# Altium PCB Sensor_Box_CAN_SENS.PCBDOC (part 1 of 2)
Units mm, origin at the board's own origin, x right, y up, seen from the top; angles counter-clockwise.
Board outline 78 x 49 mm, 2 copper layers (Top, Bot), stack 1.571 mm thick; 70 components, 54 nets, 293 pads, 158 vias.
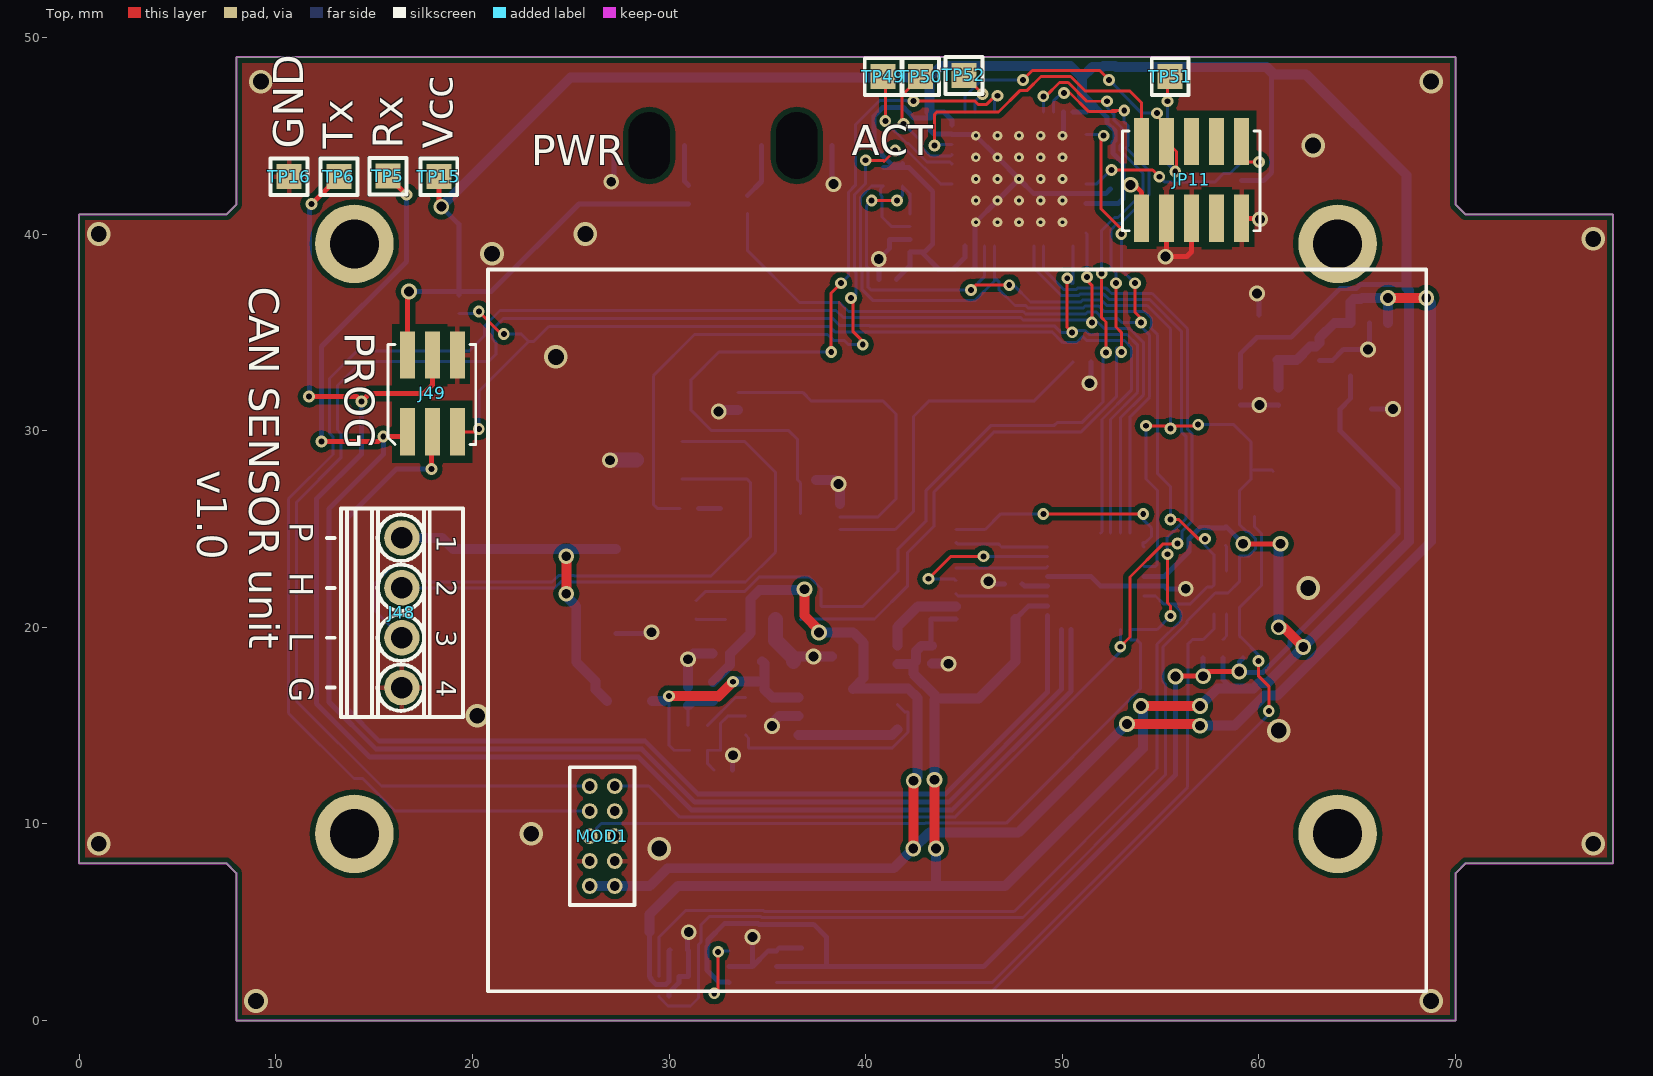
[diagram p0: Top view]
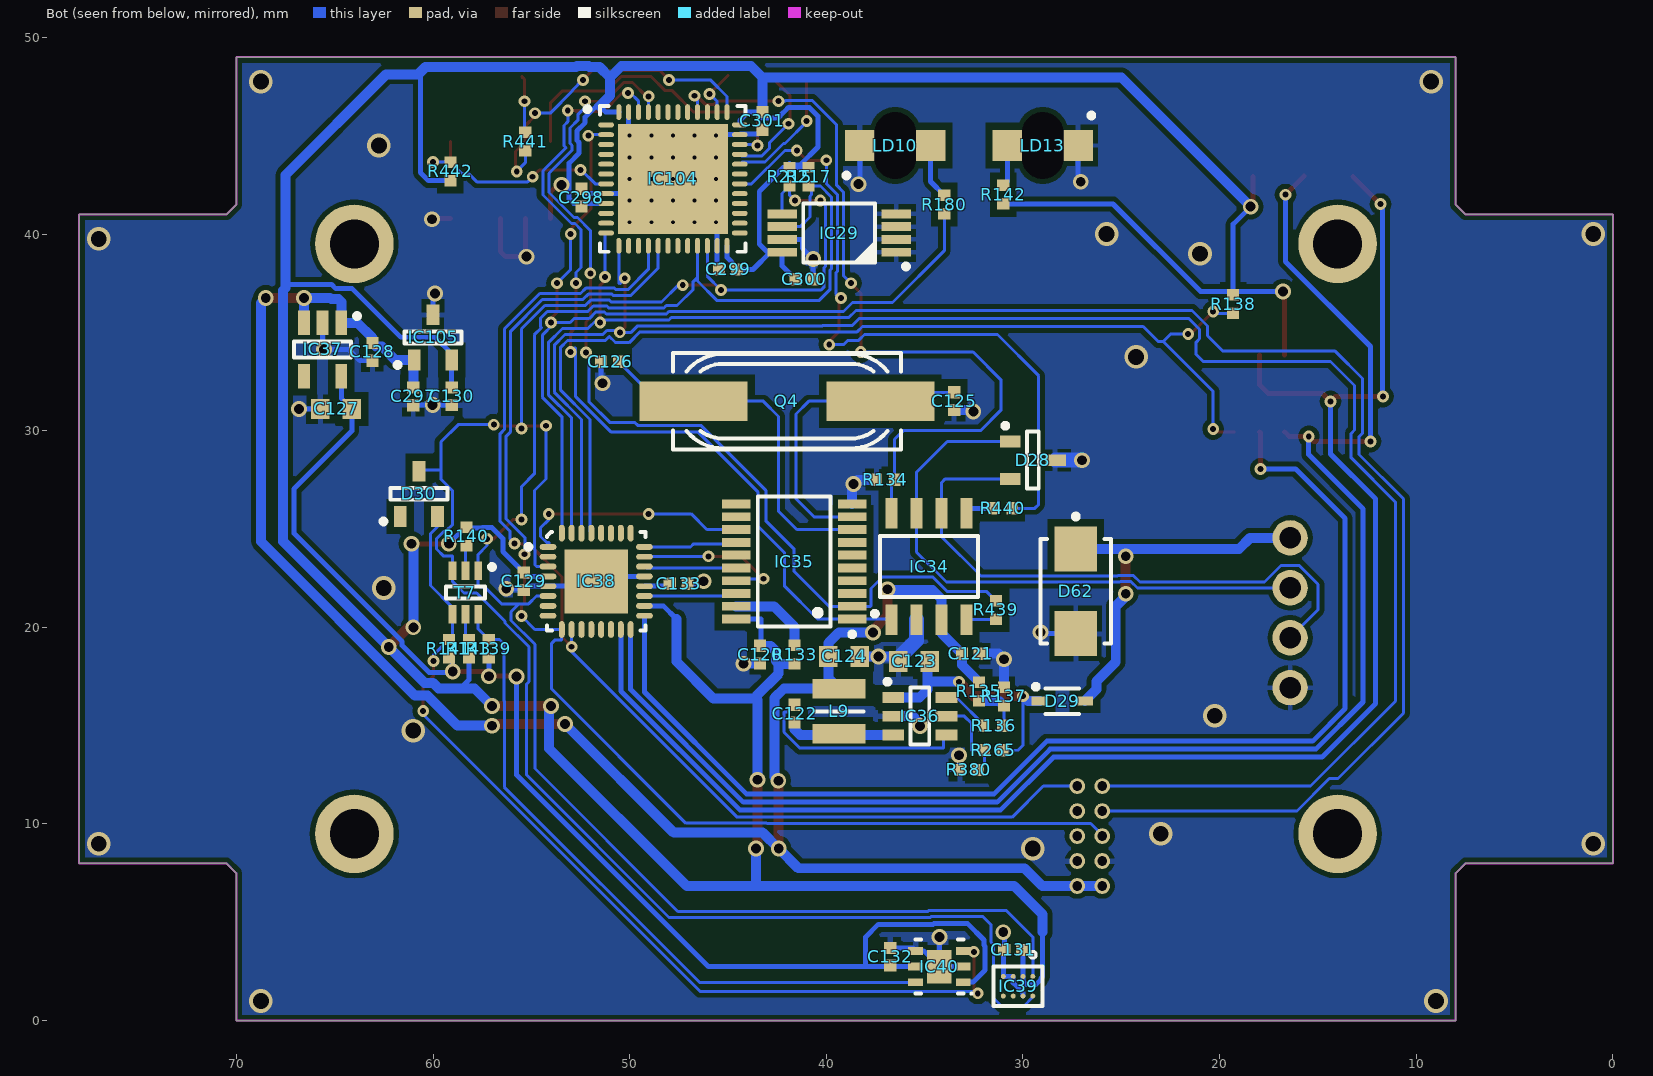
[diagram p1: Bot view, seen from below]
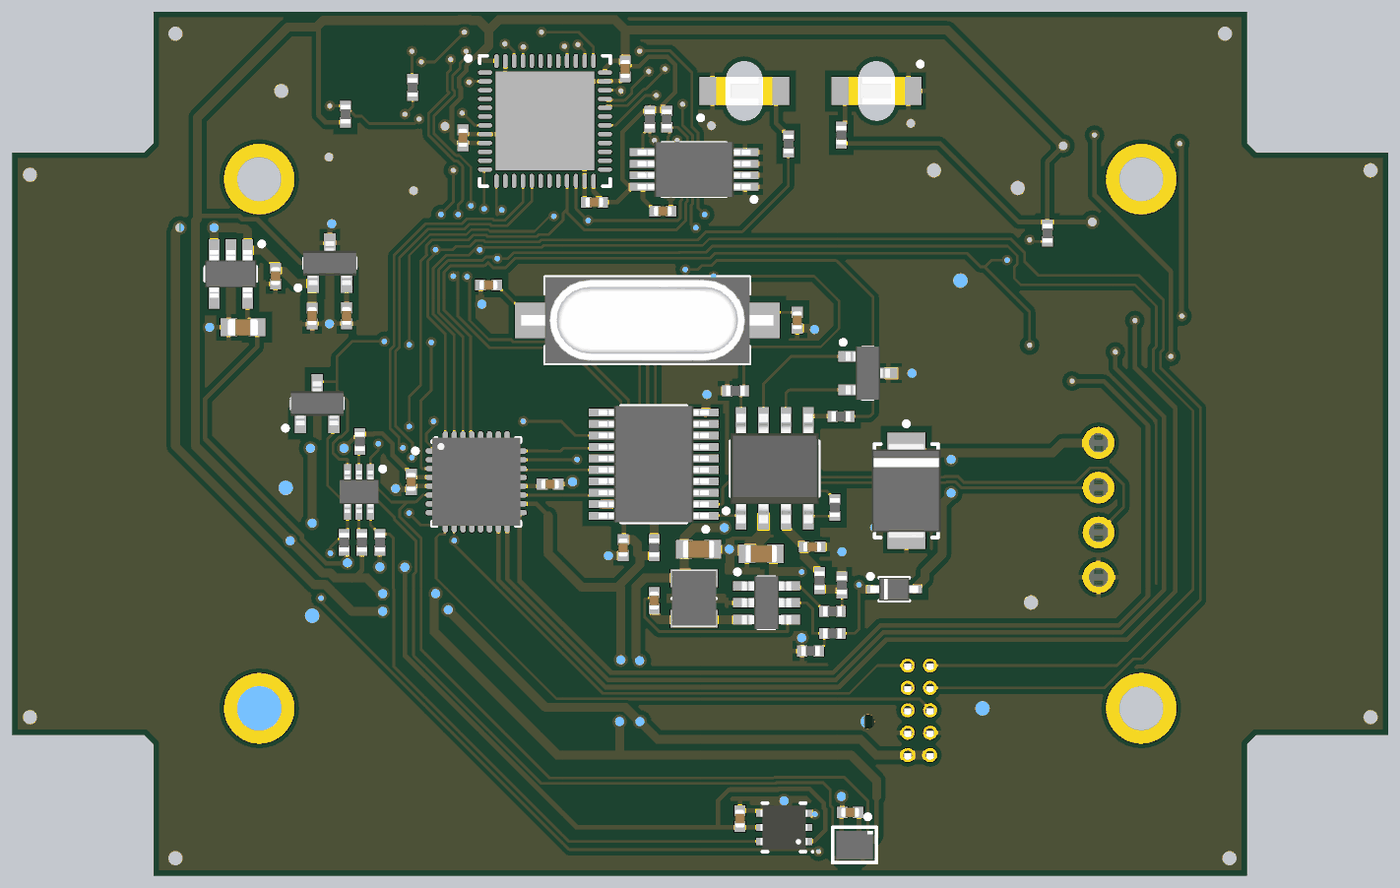
[diagram p2: 3D render of the assembled board from below, using the file's embedded part models]

## Layer stack, top to bottom
TopSolder: solder mask 0.0102, Solder Resist, Dk 3.5
Top: signal copper 0.0356
Dielectric1: core 1.5, FR-4, Dk 4.8
Bot: signal copper 0.0356
BottomSolder: solder mask 0.0102, Solder Resist, Dk 3.5

## Board outline
0,8 7.5,8 8,7.5 8,0 70,0 70,7.5 70.5,8 78,8 78,41 70.5,41 70,41.5 70,49 8,49 8,41.5 7.5,41 0,41

## Design rules (kind name [scope] priority, off if disabled: settings)
Clearance [All] p1: gap=0.152 ignorepadtopadclearanceinfootprint=FALSE except(0.254: Arc-Poly Track-Poly THPad-Poly Via-Poly Fill-Poly Poly-Poly Poly-Region Poly-Text Poly-Hole; 0.381: SMDPad-Poly)
ComponentClearance [All] p1: gap=0.254 collisioncheckmode=3 verticalgap=0 showdistances=FALSE
DiffPairsRouting [All] p1: maxlimit=0.254 minlimit=0.127 mostfreqgap=0.127 toplayer_minwidth=0.127 toplayer_maxwidth=0.381 toplayer_prefwidth=0.254 bottomlayer_minwidth=0.127 bottomlayer_maxwidth=0.381 bottomlayer_prefwidth=0.254 maxuncoupledlength=12.7
FabricationTestPointUsage TestPointUsage [All] p1: valid=0 allowmultiple=FALSE
FabricationTestpoint Testpoint [All] p1: side=3 testpointundercomponent=TRUE minsize=1.016 maxsize=2.54 preferedsize=1.524 minholesize=0.508 maxholesize=1.016 preferedholesize=0.813 testpointgrid=0.025 allowsidetop=TRUE allowsidebottom=TRUE usegrid=TRUE gridtolerance=0
HoleSize [All] p1: absolutevalues=TRUE maxlimit=3.81 minlimit=0.025 maxpercent=80.000 minpercent=20.000
HoleToHoleClearance [All] p1: gap=0.025 allowstackedmicrovias=TRUE
MinimumSolderMaskSliver [All] p1: minsoldermaskwidth=0
PlaneClearance [All] p1: clearance=0.254
PlaneConnect [All] p1: planeconnectstyle=Direct reliefexpansion=0.508 reliefentries=4 reliefconductorwidth=0.254 reliefairgap=0.254
PolygonConnect PolygonConnect_pad [(InPadClass('All Pads'))] p1: connectstyle=Relief reliefconductorwidth=0.254 reliefentries=4 polygonreliefangle="90 Angle" airgapwidth=0.254
PolygonConnect [All] p2: connectstyle=Direct reliefconductorwidth=0.254 reliefentries=4 polygonreliefangle="45 Angle" airgapwidth=0.254
RoomDefinition Sensor_Box_CAN_SENS [InComponentClass('Sensor_Box_CAN_SENS')] p1 off: confinementstyle=ConfineIn formatcopy=TRUE lockcomponents=FALSE outline 12.402,-286.6 195.152,-286.6 195.152,-262.85 12.402,-262.85
RoutingVias RoutingVias_PWR [InNetClass('PWR')] p1: holewidth=0.8 width=1.2 viastyle="Through Hole" minholewidth=0.5 minwidth=0.8 maxholewidth=0.8 maxwidth=1.2
RoutingVias [All] p2: holewidth=0.3 width=0.6 viastyle="Through Hole" minholewidth=0.2 minwidth=0.5 maxholewidth=1 maxwidth=2
SilkToSilkClearance [All] p1: silktosilkclearance=0
SilkToSolderMaskClearance SilkscreenOverComponentPads [IsPad] p1: minsilkscreentomaskgap=0 clearancetoexposedcopper=TRUE
SolderMaskExpansion [All] p1: expansion=0.051
Width Width_PWR [InNetClass('PWR')] p1: maxlimit=1.27 minlimit=0.254 preferedwidth=0.508
Width [InNetClass('All Nets')] p2: maxlimit=1.27 minlimit=0.152 preferedwidth=0.254
19 further rules are at their usual default settings.

## Classes and differential pairs
net class PWR: GND P1V8 P3V3 P5V0 P12V0

## Components (designator, comment, footprint, x,y, rotation, side; value= is the part's Value field where it differs from the comment)
C120 "100nF" CAPC1005X55N 43.366,18.614 r90 bottom
C121 "100nF" CAPC1005X55N 32.65,18.658 r0 bottom
C122 "1uF" CAPC1005X55N 41.616,15.614 r270 bottom
C123 "22uF" CAPC1709X100N 35.54,18.266 r180 bottom
C124 "22uF" CAPC1709X100N 39.096,18.52 r0 bottom
C125 "18pF" CAPC1005X55N 33.5,31.5 r90 bottom
C126 "18pF" CAPC1005X55N 51,33.5 r180 bottom
C127 "1uF" CAPC1608X87N 64.926,31.105 r0 bottom
C128 "100nF" CAPC1005X55N 63.078,34.009 r90 bottom
C129 "100nF" CAPC1005X55N 55.383,22.341 r90 bottom
C130 "100nF" CAPC1005X55N 59.05,31.75 r90 bottom
C131 "100nF" CAPC1005X55N 30.5,3.6 r180 bottom
C132 "100nF" CAPC1005X55N 36.75,3.25 r270 bottom
C133 "1uF" CAPC1005X55N 47.509,22.214 r180 bottom
C297 "1uF" CAPC1005X55N 61,31.739 r90 bottom
C298 "1uF" CAPC1005X55N 52.45,41.849 r270 bottom
C299 "100nF" CAPC1005X55N 45,38.196 r180 bottom
C300 "100nF" CAPC1005X55N 41.116,37.696 r0 bottom
C301 "100nF" CAPC1005X55N 43.25,45.75 r90 bottom
D28 "PESD1CAN-UX" SOT95P237X112-3N 29.5,28.5 r180 bottom
D29 "1N4148WS" SODFL2512X100N 28,16.25 r180 bottom
D30 "BAT54C" SOT95P240X130-3N 60.717,26.786 r90 bottom
D62 "SMBJ15A" DIOM5336X265N 27.316,21.833 r270 bottom
IC29 "M24256-BRDW6" SOP65P640X120-8N 39.35,40.049 r0 bottom
IC34 "MCP2551-I/SN" SOIC127P600X175-8N 34.778,23.092 r90 bottom
IC35 "MCP2515-I/ST" SOP65P640X110-20N 41.636,23.346 r0 bottom
IC36 "AP65111AWU-7" SOT95P280X100-6N 35.241,15.483 r180 bottom
IC37 "MIC5504-1.8YM5" SOT95P270X145-5N 65.612,34.127 r270 bottom
IC38 "ATMEGA328PB-MU" QFN50P500X500X100-33N-S325 51.7,22.341 r180 bottom
IC39 "HDC1000YPA" BGA8C100X50P2X4_159X204X68 30.25,1.75 r270 bottom
IC40 "SGP30" SON80P250X90_HS-7N 34.25,2.75 r0 bottom
IC104 "STM32F042C6U6" STM-UFQFPN48_L 47.8,42.799 r180 bottom
IC105 "AP7313-33SAG-7" SOT95P240X130-3N 60,34.742 r90 bottom
J48 "=Family" PHOENIX_1725672 16.418,20.741 r270 top
J49 "ZL322-2X3P or PLHTD6S-TR-CV" ZL322-2X3P 17.969,31.891 r0 top
JP11 "PLHTD10S-TR-CV" PLHTD10S-TR-CV 59.75,42.75 r0 top
L9 "6.8uH" IND_WALSIN_WLPN3030 39.35,15.726 r90 bottom
LD10 "Green" LED_KINGBRIGHT_KPTR3216 36.5,44.5 r0 bottom
LD13 "Green" LED_KINGBRIGHT_KPTR3216 29,44.5 r180 bottom
MOD1 "PMS7003" PLANTOWER_PMS7003 26.605,9.387 r180 top locked
Q4 "20MHz" XTAL1160X490X430 42,31.5 r0 bottom
R133 "10k" RESC1005X40N 41.616,18.614 r90 bottom
R134 "4k7" RESC1005X40N 37,27.5 r180 bottom
R135 "68k" RESC1005X40N 32.238,16.742 r90 bottom
R136 "68k" RESC1005X40N 31.5,15 r180 bottom
R137 "13k" RESC1005X40N 30.968,16.488 r270 bottom
R138 "10k" RESC1005X40N 19.315,36.438 r270 bottom
R139 "10k" RESC1005X40N 57.161,18.912 r90 bottom
R140 "10k" RESC1005X40N 58.304,24.627 r270 bottom
R141 "10k" RESC1005X40N 59.193,18.912 r90 bottom
R142 "10k" RESC1005X40N 31,42 r90 bottom
R143 "10k" RESC1005X40N 58.177,18.912 r90 bottom
R180 "10k" RESC1005X40N 34,41.5 r90 bottom
R215 "1k" RESC1005X40N 41.866,42.91 r90 bottom
R217 "1k" RESC1005X40N 40.9,42.91 r90 bottom
R265 "13k" RESC1005X40N 31.5,13.75 r180 bottom
R380 "13k" RESC1005X40N 32.75,12.75 r180 bottom
R439 "1k" RESC1005X40N 31.375,20.882 r90 bottom
R440 "1k" RESC1005X40N 31.025,26.051 r180 bottom
R441 "1k" RESC1005X40N 55.305,44.7 r90 bottom
R442 "10k" RESC1005X40N 59.115,43.185 r90 bottom
T7 "BC847BS" SOT65P210X110-6N 58.349,21.771 r270 bottom
TP5 "Test Point" TPS127 15.708,42.94 r90 top
TP6 "Test Point" TPS127 13.219,42.915 r90 top
TP15 "Test Point" TPS127 18.299,42.915 r0 top
TP16 "Test Point" TPS127 10.679,42.915 r0 top
TP49 "Test Point" TPS127 40.89,48 r90 top
TP50 "Test Point" TPS127 42.8,48 r90 top
TP51 "Test Point" TPS127 55.483,48 r90 top
TP52 "Test Point" TPS127 45,48.061 r90 top

## Footprints (in the part's own frame and the unit in brackets; to place one, negate y for a bottom-side part, rotate by r counter-clockwise, add the part's x,y. Pads: shape width x height; smd on the part's side, far side on the other; paste and mask are expansions set on the pad)
BGA8C100X50P2X4_159X204X68 [mm] "BGA, 1.00mm Pitch, Body 1.59x2.04x0.68mm; 8 Pin, 2 Columns X 4 Rows"
  round 0.25 smd: A1(-0.5,0.75) A2(0.5,0.75) B1(-0.5,0.25) B2(0.5,0.25) C1(-0.5,-0.25) C2(0.5,-0.25) D1(-0.5,-0.75) D2(0.5,-0.75)
  silkscreen extent -1.72,-1.25 1,1.25, body extent -0.81,-1.03 0.81,1.04, height 0.68
CAPC1005X55N [mm] "Chip Capacitor, Body 1.0x0.55mm, IPC Medium Density"
  rect 0.62x0.62 smd: 1(-0.45,0) 2(0.45,0)
  body extent -0.52,-0.27 0.53,0.28, height 0.55
CAPC1608X87N [mm] "Chip Capacitor, Body 1.6x0.8mm IPC Medium Density"
  rect 0.95x1 smd: 1(-0.8,0) 2(0.8,0)
  body extent -0.87,-0.47 0.88,0.48, height 0.87
CAPC1709X100N [mm] "Capacitor,non-Polarized, Chip;1.65mm L X 0.85mm W X 1.00mm H, IPC Medium Density"
  rect 0.95x1.05 smd: 1(-0.8,0) 2(0.8,0)
  body extent -0.9,-0.5 0.9,0.5, height 1
DIOM5336X265N [mm] "DO-214-AA/SMB Diode, Molded Body; 5.34mm L X 3.625mm W X 2.65mm H, IPC Medium Density"
  rect 2.3x2.15 smd: 1(-2.15,0) 2(2.15,0)
  silkscreen extent -3.92,-1.8 2.65,1.8, body extent -2.7,-1.95 2.7,1.95, height 2.4
IND_WALSIN_WLPN3030 [mm] "Miniature Surface Mount Power Inductors, 3mm L X 3mm W X 1.5mm H"
  rect 1x2.7 smd: 1(-1.145,0) 2(1.145,0)
  silkscreen extent 0,-1.25 0,1.25, body extent -1.6,-1.25 1.6,1.25, height 2.3
LED_KINGBRIGHT_KPTR3216 [mm] "Reverse Mount LED 3216, Hole 2.1x2.3mm 0.35mm Height"
  rect 1.5x1.6 smd: 1(1.8,0) 2(-1.8,0)
  oval 1.9x3.2 hole 2.1 slot 3.4 at 90 deg unplated mask+0.1: 3(0,0)
  silkscreen extent 2.35,1.4 2.6,1.65, body extent -1.6,-0.8 1.6,0.8, height 0.25
PHOENIX_1725672 [mm] "Micro PCB Terminal Block, Pitch 2.54mm, 4 Positions, Screw Connection"
  round 1.8 hole 1.1: 1(-3.81,0) 2(-1.27,0) 3(1.27,0) 4(3.81,0)
  silkscreen extent -5.31,-3.81 5.31,3.1, body extent -5.31,-3.1 5.31,3.1, height 8.5
PLANTOWER_PMS7003 [mm]
  round 0.8 hole 0.5: 1(0.635,2.54) 2(-0.635,2.54) 3(0.635,1.27) 4(-0.635,1.27) 5(0.635,0) 6(-0.635,0) 7(0.635,-1.27) 8(-0.635,-1.27) 9(0.635,-2.54) 10(-0.635,-2.54)
  silkscreen extent -41.9,-28.81 5.8,7.89, body extent -41.9,-28.81 5.8,7.89, height 12
PLHTD10S-TR-CV [mm] "SMT 1.27 mm dual goldpin"
  rect 0.76x2.4 smd: 1(-5.715,-1.95) 2(-5.715,1.95) 3(-4.445,-1.95) 4(-4.445,1.95) 5(-3.175,-1.95) 6(-3.175,1.95) 7(-1.905,-1.95) 8(-1.905,1.95) 9(-0.635,-1.95) 10(-0.635,1.95)
  silkscreen extent -6.7,-2.58 0.3,2.5, body extent -6.5,-2.15 0.1,2.15, height 4.5
QFN50P500X500X100-33N-S325 [mm] "QFN, (MO-220-VHHD-4) 0.50mm pitch,square; 8 pin X 8 pin, 5mm X 5mm X 1.00mm H body (w/thermal tab 3.25 X 3.25mm),  IPC Medium Density"
  oval 0.85x0.3 smd: 1(-2.45,1.75) 2(-2.45,1.25) 3(-2.45,0.75) 4(-2.45,0.25) 5(-2.45,-0.25) 6(-2.45,-0.75) 7(-2.45,-1.25) 8(-2.45,-1.75) 17(2.45,-1.75) 18(2.45,-1.25) 19(2.45,-0.75) 20(2.45,-0.25) 21(2.45,0.25) 22(2.45,0.75) 23(2.45,1.25) 24(2.45,1.75)
  oval 0.3x0.85 smd: 9(-1.75,-2.45) 10(-1.25,-2.45) 11(-0.75,-2.45) 12(-0.25,-2.45) 13(0.25,-2.45) 14(0.75,-2.45) 15(1.25,-2.45) 16(1.75,-2.45) 25(1.75,2.45) 26(1.25,2.45) 27(0.75,2.45) 28(0.25,2.45) 29(-0.25,2.45) 30(-0.75,2.45) 31(-1.25,2.45) 32(-1.75,2.45)
  rect 3.25x3.25 smd: 33(0,0)
  silkscreen extent -3.58,-2.5 2.5,2.5, body extent -2.5,-2.5 2.5,2.5, height 1
RESC1005X40N [mm] "Chip Resistor, EIA 0402, Metric 1005, Body 1.0x0.5mm, IPC Medium Density"
  rect 0.58x0.62 smd: 1(-0.47,0) 2(0.47,0)
  body extent -0.52,-0.27 0.53,0.28, height 0.4
SODFL2512X100N [mm] "SODFL Diode; 1.70mm W X 1.25mm L X 1.00mm H body, IPC Medium Density"
  rect 0.84x0.46 smd: 1(-1.14,0) 2(1.14,0)
  silkscreen extent -1.48,-0.65 0.85,0.85, body extent -1.35,-0.65 1.35,0.65, height 1
SOIC127P600X175-8N [mm] "SOIC 8, Pitch 1.27mm - Body 4x5mm, IPC Medium Density"
  rect 1.55x0.6 smd: 1(-2.7,1.905) 2(-2.7,0.635) 3(-2.7,-0.635) 4(-2.7,-1.905) 5(2.7,-1.905) 6(2.7,-0.635) 7(2.7,0.635) 8(2.7,1.905)
  silkscreen extent -2.52,-2.5 1.55,2.88, body extent -3.1,-2.5 3.1,2.5, height 1.75
SON80P250X90_HS-7N [mm] "SON, 6-Leads, Body 2.45x2.45mm, Pitch 0.80mm, Thermal Pad 1.70x1.25mm, IPC Medium Density"
  rect 0.75x0.4 smd: 1(-1.21,0.8) 2(-1.21,0) 3(-1.21,-0.8) 4(1.21,-0.8) 5(1.21,0) 6(1.21,0.8)
  rect 1.25x1.7 smd: 7(0,0)
  silkscreen extent -1.67,-1.37 1.22,1.42, body extent -1.33,-1.23 1.32,1.22, height 0.9
SOP65P640X110-20N [mm] "SOP, 20-Leads, Body 6.6x4.5mm (max), Pitch 0.65mm, IPC Medium Density"
  rect 1.45x0.45 smd: 1(-2.95,2.925) 2(-2.95,2.275) 3(-2.95,1.625) 4(-2.95,0.975) 5(-2.95,0.325) 6(-2.95,-0.325) 7(-2.95,-0.975) 8(-2.95,-1.625) 9(-2.95,-2.275) 10(-2.95,-2.925) 11(2.95,-2.925) 12(2.95,-2.275) 13(2.95,-1.625) 14(2.95,-0.975) 15(2.95,-0.325) 16(2.95,0.325) 17(2.95,0.975) 18(2.95,1.625) 19(2.95,2.275) 20(2.95,2.925)
  silkscreen extent -3.07,-3.3 1.85,3.82, body extent -3.12,-3.3 3.12,3.3, height 1.19
SOP65P640X120-8N [mm] "SOP, 0.65mm pitch; 8 pin, 4.40mm W X 3.00mm L X 1.20mm H body, IPC Medium Density"
  rect 1.5x0.45 smd: 1(-2.9,0.975) 2(-2.9,0.325) 3(-2.9,-0.325) 4(-2.9,-0.975) 5(2.9,-0.975) 6(2.9,-0.325) 7(2.9,0.325) 8(2.9,0.975)
  silkscreen extent -3.52,-1.5 1.83,1.82, body extent -3.2,-1.55 3.2,1.55, height 1.2
SOT65P210X110-6N [mm] "SOT363, SC70-6, SOT, 0.65mm Pitch, 6 pin, 1.25mm W X 2.00mm L X 1.10mm H, IPC Medium Density"
  rect 0.95x0.4 smd: 1(-1.1,0.65) 2(-1.1,0) 3(-1.1,-0.65) 4(1.1,-0.65) 5(1.1,0) 6(1.1,0.65)
  silkscreen extent -1.42,-1 0.3,1.47, body extent -1.2,-1.1 1.2,1.1, height 1.1
SOT95P237X112-3N [mm] "SOT, 0.95mm, pitch; 3 pin,1.30mm W X 2.92mm L X 1.12mm H body, IPC Medium Density"
  rect 1.05x0.6 smd: 1(-1.15,0.95) 2(-1.15,-0.95) 3(1.15,0)
  silkscreen extent -1.53,-1.45 0.3,1.87, body extent -1.25,-1.5 1.25,1.5, height 1.1
SOT95P240X130-3N [mm] "SOT23 3-Leads, Pitch 0.95mm - Body 1.3x2.9mm, IPC Medium Density"
  rect 1.05x0.65 smd: 1(-1.15,0.95) 2(-1.15,-0.95) 3(1.15,0)
  silkscreen extent -1.52,-1.45 0.3,1.92, body extent -1.25,-1.5 1.25,1.5, height 1.3
SOT95P270X145-5N [mm] "SOT, 0.95mm Pitch; 5 Pin,1.55mm W X 2.90mm L X 1.45mm H body, IPC Medium Density"
  rect 1.25x0.6 smd: 1(-1.35,0.95) 2(-1.35,0) 3(-1.35,-0.95) 4(1.35,-0.95) 5(1.35,0.95)
  silkscreen extent -1.82,-1.45 0.4,1.87, body extent -1.35,-1.45 1.35,1.45, height 1.45
SOT95P280X100-6N [mm] "SOT23, 0.95mm pitch; 6 pin, 1.625mm W X 2.90mm L X 1.00mm H body, IPC Medium Density"
  rect 1.1x0.55 smd: 1(-1.35,0.95) 2(-1.35,0) 3(-1.35,-0.95) 4(1.35,-0.95) 5(1.35,0) 6(1.35,0.95)
  silkscreen extent -1.78,-1.45 0.48,1.87, body extent -1.4,-1.5 1.4,1.5, height 1
STM-UFQFPN48_L [mm] "QFN, 48-Leads, Body 7.1x7.1mm, Pitch 0.5mm, Thermal Pad 5.6x5.6mm, IPC High Density"
  oval 0.8x0.25 smd: 1(-3.4,2.75) 2(-3.4,2.25) 3(-3.4,1.75) 4(-3.4,1.25) 5(-3.4,0.75) 6(-3.4,0.25) 7(-3.4,-0.25) 8(-3.4,-0.75) 9(-3.4,-1.25) 10(-3.4,-1.75) 11(-3.4,-2.25) 12(-3.4,-2.75) 25(3.4,-2.75) 26(3.4,-2.25) 27(3.4,-1.75) 28(3.4,-1.25) 29(3.4,-0.75) 30(3.4,-0.25) 31(3.4,0.25) 32(3.4,0.75) 33(3.4,1.25) 34(3.4,1.75) 35(3.4,2.25) 36(3.4,2.75)
  oval 0.25x0.8 smd: 13(-2.75,-3.4) 14(-2.25,-3.4) 15(-1.75,-3.4) 16(-1.25,-3.4) 17(-0.75,-3.4) 18(-0.25,-3.4) 19(0.25,-3.4) 20(0.75,-3.4) 21(1.25,-3.4) 22(1.75,-3.4) 23(2.25,-3.4) 24(2.75,-3.4) 37(2.75,3.4) 38(2.25,3.4) 39(1.75,3.4) 40(1.25,3.4) 41(0.75,3.4) 42(0.25,3.4) 43(-0.25,3.4) 44(-0.75,3.4) 45(-1.25,3.4) 46(-1.75,3.4) 47(-2.25,3.4) 48(-2.75,3.4)
  rect 5.6x5.6 smd: 49(0,0)
  silkscreen extent -4.48,-3.7 3.7,3.7, body extent -3.55,-3.55 3.55,3.55, height 0.6
TPS127 [mm] "1.27 x  1.27mm SMD Test Point Area"
  rect 1.27x1.27 smd paste-1.27: 1(0,0)
  silkscreen extent -0.94,-0.94 0.94,0.94
XTAL1160X490X430 [mm] "HC49/4H SMX Case, SMD Cristal, Body 11.6x4.9mm"
  rect 5.5x2 smd: 1(-4.75,0) 2(4.75,0)
  silkscreen extent -5.8,-2.45 5.8,2.45, body extent -7.15,-2.45 7.15,2.45, height 4.3
ZL322-2X3P [mm] "SMT 1.27 mm dual goldpin"
  rect 0.76x2.4 smd: 1(-1.27,-1.95) 2(-1.27,1.95) 3(0,-1.95) 4(0,1.95) 5(1.27,-1.95) 6(1.27,1.95)
  silkscreen extent -2.25,-2.59 2.21,2.49, body extent -2.05,-2.15 2.03,2.15, height 4.5

## Part data
C120 C121 C128 C129 C130 C131 C132 C299 C300 C301: library part CC0402_100NF_16V_10%_X5R, "Non-polarised capacitor", Case=0402, Manufacturer=GENERIC, Manufacturer1 ComponentHeight=0.55mm, Manufacturer1 Example=MURATA, Manufacturer1 Part Number=GRM155R61C104KA88D, Tolerance=±10%, Voltage=16V, Author="CERN DEM JLC", Component Type=Standard, CreateDate=10.12.2013, HelpURL=\\cern.ch\dfs\Applications\Altium\Datasheets\CC0402_X5R_MURATA_GRM.pdf, LatestRevisionDate=10.12.2013, Manufacturer Part Number=CC0402_100NF_16V_10%_X5R, Mounted=Yes, Part Description="SMD Multilayer Chip Ceramic Capacitor", Part Number=CC0402_100NF_16V_10%_X5R, Pin Count=2, Sense=No, SMD=Yes, Socket=No, Status=None, TC=X5R
C122 C133 C297 C298: library part CC0402_1UF_16V_10%_X5R, "Non-polarised capacitor", Case=0402, Manufacturer=GENERIC, Manufacturer1 ComponentHeight=0.55mm, Manufacturer1 Example=TDK, Manufacturer1 Part Number=C1005X5R1C105KT, Tolerance=±10%, Voltage=16V, Author="CERN DEM JLC", Component Type=Standard, CreateDate=25.10.2012, HelpURL=\\cern.ch\dfs\Applications\Altium\Datasheets\CC0402_X5R_TDK_C.pdf, LatestRevisionDate=25.10.2012, Manufacturer Part Number=CC0402_1UF_16V_10%_X5R, Mounted=Yes, Part Description="SMD Multilayer Chip Ceramic Capacitor", Part Number=CC0402_1UF_16V_10%_X5R, Pin Count=2, Sense=No, SMD=Yes, Socket=No, Status=Preferred, TC=X5R
C123 C124: library part CC0603_22UF_6.3V_20%_X5R, "Non-polarised capacitor", Case=0603, Manufacturer=GENERIC, Manufacturer1 ComponentHeight=1mm, Manufacturer1 Example=TDK, Manufacturer1 Part Number=C1608X5R0J226M080AC, Tolerance=±20%, Voltage=6.3V, Author="CERN DEM JLC", Component Type=Standard, CreateDate=16.12.2013, HelpURL=\\cern.ch\dfs\Applications\Altium\Datasheets\CC0603_X5R_TDK_C.pdf, LatestRevisionDate=13.09.2016, Manufacturer Part Number=CC0603_22UF_6.3V_20%_X5R, Mounted=Yes, Part Description="SMD Multilayer Chip Ceramic Capacitor", Part Number=CC0603_22UF_6.3V_20%_X5R, Pin Count=2, Sense=No, SMD=Yes, Socket=No, Status=None, TC=X5R
C125 C126: library part CC0402_18PF_50V_5%_C0G, "Non-polarised capacitor", Case=0402, Manufacturer=GENERIC, Manufacturer1 ComponentHeight=0.55mm, Manufacturer1 Example=KEMET, Manufacturer1 Part Number=C0402C180J5GACTU, Tolerance=±5%, Voltage=50V, Author="CERN DEM JLC", Component Type=Standard, CreateDate=04.10.2016, HelpURL="\\cern.ch\dfs\Applications\Altium\Datasheets\CC0805_C0G_KEMET_(Commercial Grade).pdf", LatestRevisionDate=04.10.2016, Manufacturer Part Number=CC0402_18PF_50V_5%_C0G, Mounted=Yes, Part Description="SMD Multilayer Chip Ceramic Capacitor", Part Number=CC0402_18PF_50V_5%_C0G, Pin Count=2, Sense=No, SMD=Yes, Socket=No, Status=Preferred, TC=C0G/NP0
C127: library part CC0603_1UF_25V_10%_X7R, "Non-polarised capacitor", Case=0603, Manufacturer=GENERIC, Manufacturer1 ComponentHeight=0.9mm, Manufacturer1 Example=MURATA, Manufacturer1 Part Number=GRM188R71E105KA12D, Tolerance=±10%, Voltage=25V, Author="CERN DEM JLC", Component Type=Standard, CreateDate=2011-01-18, HelpURL=\\cern.ch\dfs\Applications\Altium\Datasheets\CC0603_X7R_MURATA.pdf, LatestRevisionDate=2011-01-18, Manufacturer Part Number=CC0603_1UF_25V_10%_X7R, Mounted=Yes, Part Description="SMD Multilayer Chip Ceramic Capacitor", Part Number=CC0603_1UF_25V_10%_X7R, Pin Count=2, SMD=Yes, Socket=No, Status=None, Table="Capacitors SMD", TC=X7R
D28: "TVS Diode for CAN", Case=SOT-23, Manufacturer=Nexperia, Power=400W, Voltage=24V, Author="CERN DEM JLC", Bonding=No, ComponentHeight=1.12mm, Component Type=Standard, CreateDate=03.09.2014, Device=PESD1CAN-UX, HelpURL=\\cern.ch\dfs\Applications\Altium\Datasheets\SM712.TCT.pdf, LatestRevisionDate=13.01.2015, Manufacturer Part Number=PESD1CAN-UX, Mounted=Yes, PackageDescription="SOT, 0.95mm, pitch; 3 pin,1.30mm W X 2.92mm L X 1.12mm H body, IPC Medium Density", Part Description="TVS Diode for CAN", Part Number=PESD1CAN-UX, Pin Count=3, PressFit=No, Sense=No, SMD=Yes, Socket=No
D29: "Diode", Case=SOD-323F, Manufacturer="FAIRCHILD SEMICONDUCTOR", Power=150mA, Voltage=75V, Author="CERN DEM JLC", Bonding=No, ComponentHeight=1mm, Component Type=Standard, CreateDate=12.05.2011, Device=1N4148WS, HelpURL=\\cern.ch\dfs\Applications\Altium\Datasheets\1N4148WS.pdf, LatestRevisionDate=12.05.2011, Manufacturer Part Number=1N4148WS, Mounted=Yes, PackageDescription="SODFL Diode; 1.70mm W X 1.25mm L X 1.00mm H body, IPC Medium Density", Part Description="Small Signal Diodes", Part Number=1N4148WS, Pin Count=2, PressFit=No, Sense=No, SMD=Yes, Socket=No
D30: "Dual Common Cathode Schottky Diodes", Case=SOT23-3, Manufacturer="FAIRCHILD SEMICONDUCTOR", Power=200mA, Voltage=30V, Author="CERN DEM JLC", Bonding=No, ComponentHeight=1.30mm, Component Type=Standard, CreateDate=17.09.2009, Device=BAT54C, HelpURL=\\cern.ch\dfs\Applications\Altium\Datasheets\BAT54C.pdf, LatestRevisionDate=27.05.2010, Manufacturer Part Number=BAT54C, Mounted=Yes, PackageDescription="SOT23 3-Leads, Pitch 0.95mm - Body 1.3x2.9mm, IPC Medium Density", Part Description="Dual Common Cathode Small Signal Schottky Diode", Part Number=BAT54C, Pin Count=3, PressFit=No, Sense=No, SMD=Yes, Socket=No
D62: "Zener Diode", Case=DO-214AA, Manufacturer="FAIRCHILD SEMICONDUCTOR", Power=600W, Voltage=15V, Author="CERN DEM JLC", Bonding=No, ComponentHeight=2.65mm, Component Type=Standard, CreateDate=08.12.2008, Device=SMBJ15A, HelpURL=\\cern.ch\dfs\Applications\Altium\Datasheets\SMBJ.pdf, LatestRevisionDate=19.12.2011, Manufacturer Part Number=SMBJ15A, Mounted=Yes, PackageDescription="DO-214-AA/SMB Diode, Molded Body; 5.34mm L X 3.625mm W X 2.65mm H, IPC Medium Density", Part Description="Uni-Directional Transient Voltage Suppressor Diode", Part Number=SMBJ15A, Pin Count=2, PressFit=No, Sense=No, SMD=Yes, Socket=No
IC29: "256-Kbit Serial I²C Bus EEPROM", Case=TSSOP8, Manufacturer="ST MICROELECTRONICS", Part Number=M24256-BRDW6P, Author="CERN DEM MR", Bonding=No, ComponentHeight=1.2mm, Component Type=Standard, CreateDate=17.03.2016, Device=M24256-BRDW6, HelpURL=\\cern.ch\dfs\Applications\Altium\Datasheets\M24256-BRDW6P.pdf, LatestRevisionDate=17.03.2016, Manufacturer Part Number=M24256-BRDW6, Mounted=Yes, PackageDescription="SOP, 0.65mm pitch; 8 pin, 4.40mm W X 3.00mm L X 1.20mm H body, IPC Medium Density", Part Description="256-Kbit Serial I²C Bus EEPROM", Pin Count=8, PressFit=No, Sense=No, SMD=Yes, Socket=No
IC34: "High-Speed CAN Transceiver, 8-Pin SOIC, Industrial Temperature", Case=SOIC8, Manufacturer="MICROCHIP TECHNOLOGY", Author=GK, Bonding=No, ComponentHeight=1.75mm, Component Type=Standard, CreateDate=07.09.2016, Device=MCP2551-I/SN, LatestRevisionDate=07.09.2016, Manufacturer Part Number=MCP2551-I/SN, Mounted=Yes, PackageDescription="SOIC 8, Pitch 1.27mm - Body 4x5mm, IPC Medium Density", Part Description="High-Speed CAN Transceiver", Part Number=MCP2551-I/SN, Pin Count=8, PressFit=No, Sense=No, SMD=Yes, Socket=No
IC35: library part IFC_MCP2515_TSSOP, "CAN Controller With SPI nterface", Case=TSSOP20, Manufacturer=Microchip, Manufacturer Part Number=MCP2515T-I/ST, Component Type=Standard, Device=MCP2515, Mounted=Yes, PackageDescription="TSSOP 20, Pitch 0.65mm - Body 4.5x6.5mm, IPC Medium Density", Part Description="Stand-Alone CAN Controller with SPI Interface", Part Number=MCP2515T-I/ST, Pin Count=20, SMD=Yes
IC36: "Light Load Improved 1.5A Synch DC/DC Buck Converter", Case=SOT23-6, Manufacturer="DIODES INCORPORATED", Author="CERN DEM JLC", Bonding=No, ComponentHeight=1.1mm, Component Type=Standard, CreateDate=20.03.2018, Device=AP65111AWU-7, HelpURL=\\cern.ch\dfs\Applications\Altium\Datasheets\AP65111AWU-7.pdf, LatestRevisionDate=20.03.2018, Manufacturer Part Number=AP65111AWU-7, Mounted=Yes, PackageDescription="SOT23, 0.95mm pitch; 6 pin, 1.625mm W X 2.90mm L X 1.00mm H body, IPC Medium Density", Part Description="Light Load Improved 1.5A Synch DC/DC Buck Converter", Part Number=AP65111AWU-7, Pin Count=6, PressFit=No, Sense=No, SMD=Yes, Socket=No
IC37: "300mA, High PSRR, Low Quiescent Current LDO", Case=SOT23-5, Manufacturer="MICROCHIP TECHNOLOGY", Author=GK, Bonding=No, ComponentHeight=1.45mm, Component Type=Standard, CreateDate=03.05.2012, Device=MIC5504-1.8YM5, HelpURL=\\cern.ch\dfs\Applications\Altium\Datasheets\MCP1802T-3002I-OT.pdf, LatestRevisionDate=17.09.2014, Manufacturer Part Number=MIC5504-1.8YM5, Mounted=Yes, PackageDescription="SOT, 0.95mm Pitch; 5 Pin,1.55mm W X 2.90mm L X 1.45mm H body, IPC Medium Density", Part Description="1.8V, 300mA, High PSRR, Low Quiescent Current LDO", Part Number=MIC5504-1.8YM5, Pin Count=3, PressFit=No, Sense=No, SMD=Yes, Socket=No
IC38: "8-bit AVR 20MHz Microcontroller With 32K Bytes In-System  Programmable  Flash", Case=QFN32, Manufacturer=ATMEL, Author=GK, Bonding=No, ComponentHeight=1mm, Component Type=Standard, CreateDate=2011-02-08, Device=ATMEGA328PB-MU, HelpURL=\\cern.ch\dfs\Applications\Altium\Datasheets\ATMEGA328P-MU.pdf, LatestRevisionDate=2014-07-02, Manufacturer Part Number=ATMEGA328PB-MU, Mounted=Yes, PackageDescription="QFN, (MO-220-VHHD-2) 0.50mm pitch,square; 8 pin X 8 pin, 5mm X 5mm X 1.00mm H body (w/thermal tab 3.25 X 3.25mm),  IPC Medium Density", Part Description="8-bit AVR Microcontroller, 32KB Flash, 1KB EEPROM, 2KB SRAM, 32-pin MLF, Industrial Grade (-40°C to 85°C)", Part Number=ATMEGA328PB-MU, Pin Count=33, PressFit=No, Sense=No, SMD=Yes, Socket=No
IC39: "Low Power, High Accuracy Digital Humidity Sensor With Temperature Sensor", Case=DSBGA8, Manufacturer="TEXAS INSTRUMENTS", Author="CERN DEM MR", Bonding=No, ComponentHeight=0.68mm, Component Type=Standard, CreateDate=08.02.2016, Device=HDC1000YPA, HelpURL=\\cern.ch\dfs\Applications\Altium\Datasheets\HDC1000YPA.pdf, LatestRevisionDate=08.02.2016, Manufacturer Part Number=HDC1000YPA, Mounted=Yes, PackageDescription="BGA, 1.00mm pitch, Body 1.59x2.04x0.68mm; 8 pin, 2 columns X 4 rows", Part Description="Low Power, High Accuracy Digital Humidity Sensor With Temperature Sensor", Part Number=HDC1000YPA, Pin Count=8, PressFit=No, Sense=No, SMD=Yes, Socket=No
IC40: "MEMS metal  -  oxide gas sensor for measuring  volatile organic compounds (VOCs)", Case=DFN6, Manufacturer=SENSIRION, Author="CERN DEM JLC", Bonding=No, ComponentHeight=0.9, Component Type=Standard, CreateDate=27.02.2013, Device=SGP30, HelpURL=\\cern.ch\dfs\Applications\Altium\Datasheets\SHT21S.pdf, LatestRevisionDate=09.11.2017, Manufacturer Part Number=SGP30, Mounted=Yes, PackageDescription="DFN 2.45 x 2.45 x 0.9 mm", Part Description="MEMS metal - oxide gas sensor for measuring  volatile organic compounds (VOCs)", Part Number=SGP30, Pin Count=6, PressFit=No, Sense=Yes, Sense Comment=Non-washable, SMD=Yes, Socket=No
IC104: library part CMP-0304-00104-1, "ARM Cortex-M0 32-bit MCU, 32 KB Flash, 6 KB Internal RAM, 38 I/Os, 48-Pin UFQFPN, -40 to 85 degC, Tray", I/Os (High Current)=38, Operating Frequency(F) (Processor speed) (MHz)=48, Package Description="48-Pin Ultra Thin Fine Pitch Quad Flat No-Lead, 7 x 7 x 0.6 mm Body, 0.5 mm Pitch, Exposed Pad", Package Reference=UFQFPN48, Supply Voltage(Vcc) min (V)=2, ComponentLink1Description="Manufacturer URL", ComponentLink1URL=http://www.st.com/, ComponentLink2Description=Datasheet, ComponentLink2URL=http://www.st.com/st-web-ui/static/active/en/resource/technical/document/datasheet/DM00105814.pdf, Core="ARM Cortex-M0", DatasheetVersion="Rev. 5", FLASH Size (Prog) (kB)=32, Internal RAM Size (kB)=6, Mounting Technology="Surface Mount", Packing=Tray
IC105: "3-Terminal Regulator 1=IN 2=OUT 3=GND", Case=SOT23, Manufacturer="DIODES INCORPORATED", Author="CERN DEM JLC", Bonding=No, ComponentHeight=1.35mm, Component Type=Standard, CreateDate=20.03.2018, Device=AP7313-33SAG-7, HelpURL=\\cern.ch\dfs\Applications\Altium\Datasheets\AP7313-33SAG-7.pdf, LatestRevisionDate=20.03.2018, Manufacturer Part Number=AP7313-33SAG-7, Mounted=Yes, PackageDescription="SOT23 3-Leads, Pitch 0.95mm - Body 1.3x2.9mm, IPC Medium Density", Part Description="3.3V, 150mA Low Quiescent Current, Fast Transient Low Dropout Linear Regulator", Part Number=AP7313-33SAG-7, Pin Count=3, PressFit=No, Sense=No, SMD=Yes, Socket=No
J48: library part PHOENIX_1725672, "Terminal Block, 4 Positions, Screw Connection", Manufacturer="PHOENIX CONTACT", Manufacturer Part Number="1725672 (MPT 0,5/4-2,54)", Author="CERN DEM JMW", ComponentHeight=8.5mm, Component Type=Standard, CreateDate=07.11.2008, HelpURL=\\cern.ch\dfs\Applications\Altium\Datasheets\PHOENIX_1725672.pdf, LatestRevisionDate=26.04.2010, Mounted=Yes, Part Description="6A, 63V, Terminal Block, Pitch 2.54mm, 4 Positions, Screw Connection", Part Number=PHOENIX_1725672, Pin Count=4, PressFit=No, Sense=No, SMD=No, Socket=No, Status=None
J49: library part "CON_2x3 1.27 SMT Male", "1.27 mm dual row goldpin (Maritex)"
JP11: library part "CON_2x5 1.27 SMT Male", "1.27 mm dual row goldpin (Maritex)"
L9: "6,8uH; 900mA; 0,211O; 3x3x1,5mm", Manufacturer=WALSIN, Manufacturer Part Number=WLPN303015M6R8PB, Part Number=IND_6.8UH_20%_WALSIN_WLPN303015M6R8PB, Power=900mA, Resistance=0.21R, Tolerance=±20%, Author=GK, ComponentHeight=1.5, Component Type=Standard, CreateDate=11.07.2016, HelpURL=\\cern.ch\dfs\Applications\Altium\Datasheets\IND_MURATA-PS_8200.pdf, LatestRevisionDate=11.07.2016, Mounted=Yes, Part Description="Miniature Surface Mount Power Inductor (8200 Series)", Pin Count=2, Sense=No, SMD=Yes, Socket=No, Status=None
LD10 LD13: library part LED_KINGBRIGHT_KPTR-3216CGCK, "LED Green 1A 2C", Manufacturer=KINGBRIGHT, Manufacturer Part Number=KPTR-3216CGCK, Author="CERN DEM MR", Bonding=No, Color=Green, ComponentHeight=0.35mm, Component Type=Standard, CreateDate=15.02.2016, HelpURL=\\cern.ch\dfs\Applications\Altium\Datasheets\LED_KINGBRIGHT_KPTR-3216CGCK.pdf, LatestRevisionDate=15.02.2016, Mounted=Yes, PackageDescription="Reverse Mount LED 3216, Hole 2.1x2.3mm 0.35mm Height", Part Description="Reverse Mount LED 1.4x1.6mm Green", Part Number=LED_KINGBRIGHT_KPTR-3216CGCK, Pin Count=2, PressFit=No, Sense=No, SMD=Yes, Socket=No
MOD1: "Digital universal particle concentration sensor", Manufacturer=PLANTOWER, Author=GK, Bonding=No, ComponentHeight=12, Component Type=Standard, CreateDate=14.01.2018, Device=PMS7003, HelpURL=\\cern.ch\dfs\Applications\Altium\Datasheets\HGT-2101.pdf, LatestRevisionDate=14.01.2018, Manufacturer Part Number=PMS7003, Mounted=Yes, PackageDescription="Module 48x37x12, 10 pin", Part Description="Digital universal particle concentration sensor", Part Number=PMS7003, Pin Count=10, PressFit=No, Sense=No, SMD=Yes, Socket=No
Q4: "Quartz Crystal 20MHz, 30ppm, 20pF", Manufacturer="SR PASSIVES", Manufacturer Part Number=20M-49SMD-SR, Part Number="SR PASSIVES 20M-49SMD-SR", Author=GK, Bonding=No, ComponentHeight=4.3mm, Component Type=Standard, CreateDate=19.04.2012, HelpURL=\\cern.ch\dfs\Applications\Altium\Datasheets\XTAL_IQD_LFXTAL003166.pdf, LatestRevisionDate=07.11.2016, Mounted=Yes, PackageDescription="HC49/4H SMX Case, SMD Cristal, Body 11.6x4.9mm", Part Description="Tolerance:± 30ppm, Stability:± 50ppm, -10°C to +60°C, 20pF, Surface Mount Quartz Crystal, HC49/4HSMX Series", Pin Count=2, PressFit=No, Sense=No, SMD=Yes, Socket=No
R133 R138 R139 R140 R141 R142 R143 R180 R442: library part R0402_10K_1%_0.0625W_100PPM, "Resistor - 1%", Case=0402, Manufacturer=GENERIC, Manufacturer1 ComponentHeight=0.4mm, Manufacturer1 Example="YAGEO PHYCOMP", Manufacturer1 Part Number=232270671003L, Power=0.0625W, Tolerance=±1%, Author="CERN DEM JLC", Component Type=Standard, HelpURL=\\cern.ch\dfs\Applications\Altium\Datasheets\R0402_Phycomp_RC0402.pdf, Manufacturer Part Number=R0402_10K_1%_0.0625W_100PPM, Mounted=Yes, Part Description="General Purpose Thick Film Chip Resistor", Part Number=R0402_10K_1%_0.0625W_100PPM, Pin Count=2, SMD=Yes, Socket=No, TC=±100ppm/°C
  R133 R138 R142 R180 R442: CreateDate=03.12.2007, LatestRevisionDate=17.10.2012, PressFit=No, Sense=No, Status="Not Recommended"
  R139 R140 R141 R143: CreateDate=2007-12-03, LatestRevisionDate=2012-10-17, Status="Not recommended", Table="Resistors SMD"
R134: library part R0402_4K7_1%_0.0625W_100PPM, "Resistor - 1%", Case=0402, Manufacturer=GENERIC, Manufacturer1 ComponentHeight=0.4mm, Manufacturer1 Example="YAGEO PHYCOMP", Manufacturer1 Part Number=232270674702L, Power=0.0625W, Tolerance=±1%, Author="CERN DEM JLC", Component Type=Standard, CreateDate=03.12.2007, HelpURL=\\cern.ch\dfs\Applications\Altium\Datasheets\R0402_Phycomp_RC0402.pdf, LatestRevisionDate=17.10.2012, Manufacturer Part Number=R0402_4K7_1%_0.0625W_100PPM, Mounted=Yes, Part Description="General Purpose Thick Film Chip Resistor", Part Number=R0402_4K7_1%_0.0625W_100PPM, Pin Count=2, PressFit=No, Sense=No, SMD=Yes, Socket=No, Status="Not Recommended", TC=±100ppm/°C
R135 R136: library part R0402_68K_1%_0.0625W_100PPM, "Resistor - 1%", Case=0402, Manufacturer=GENERIC, Manufacturer1 ComponentHeight=0.4mm, Manufacturer1 Example="YAGEO PHYCOMP", Manufacturer1 Part Number=232270676803L, Power=0.0625W, Tolerance=±1%, Author="CERN DEM JLC", Component Type=Standard, CreateDate=03.12.2007, HelpURL=\\cern.ch\dfs\Applications\Altium\Datasheets\R0402_Phycomp_RC0402.pdf, LatestRevisionDate=17.10.2012, Manufacturer Part Number=R0402_68K_1%_0.0625W_100PPM, Mounted=Yes, Part Description="General Purpose Thick Film Chip Resistor", Part Number=R0402_68K_1%_0.0625W_100PPM, Pin Count=2, PressFit=No, Sense=No, SMD=Yes, Socket=No, Status="Not Recommended", TC=±100ppm/°C
R137 R265 R380: library part R0402_13K_1%_0.0625W_100PPM, "Resistor - 1%", Case=0402, Manufacturer=GENERIC, Manufacturer1 ComponentHeight=0.4mm, Manufacturer1 Example="YAGEO PHYCOMP", Manufacturer1 Part Number=232270671303L, Power=0.0625W, Tolerance=±1%, Author="CERN DEM JLC", Component Type=Standard, CreateDate=03.12.2007, HelpURL=\\cern.ch\dfs\Applications\Altium\Datasheets\R0402_Phycomp_RC0402.pdf, LatestRevisionDate=17.10.2012, Manufacturer Part Number=R0402_13K_1%_0.0625W_100PPM, Mounted=Yes, Part Description="General Purpose Thick Film Chip Resistor", Part Number=R0402_13K_1%_0.0625W_100PPM, Pin Count=2, PressFit=No, Sense=No, SMD=Yes, Socket=No, Status="Not Recommended", TC=±100ppm/°C
R215 R217 R439 R440 R441: library part R0402_1K_1%_0.0625W_100PPM, "Resistor - 1%", Case=0402, Manufacturer=GENERIC, Manufacturer1 ComponentHeight=0.4mm, Manufacturer1 Example="YAGEO PHYCOMP", Manufacturer1 Part Number=232270671002L, Power=0.0625W, Tolerance=±1%, Author="CERN DEM JLC", Component Type=Standard, CreateDate=03.12.2007, HelpURL=\\cern.ch\dfs\Applications\Altium\Datasheets\R0402_Phycomp_RC0402.pdf, LatestRevisionDate=17.10.2012, Manufacturer Part Number=R0402_1K_1%_0.0625W_100PPM, Mounted=Yes, Part Description="General Purpose Thick Film Chip Resistor", Part Number=R0402_1K_1%_0.0625W_100PPM, Pin Count=2, PressFit=No, Sense=No, SMD=Yes, Socket=No, Status="Not Recommended", TC=±100ppm/°C
T7: "45V 100mA Dual NPN General-Purpose Transistor", Case=SOT363, Manufacturer="NXP SEMICONDUCTORS", Author="CERN DEM JMW", Bonding=No, ComponentHeight=1.1mm, Component Type=Standard, CreateDate=10.07.2015, Device=BC847BS, HelpURL=\\cern.ch\dfs\Applications\Altium\Datasheets\BC847BS.pdf, LatestRevisionDate=10.07.2015, Manufacturer Part Number=BC847BS, Mounted=Yes, PackageDescription="SOT363, SC-88, SOT, 0.65mm Pitch, 6 pin, 1.25mm W X 2.00mm L X 1.10mm H, IPC Medium Density", Part Description="45V 100mA Dual NPN General-Purpose Transistor", Part Number=BC847BS, Pin Count=6, PressFit=No, Sense=No, SMD=Yes, Socket=No
TP5 TP6 TP15 TP16 TP49 TP50 TP51 TP52: library part SMD_PAD_1.27X1.27MM, Author="CERN DEM JLC", ComponentHeight=0mm, Component Type="Standard (No BOM)", CreateDate=12.01.2008, Family="Test Point", HelpURL=Undefined, LatestRevisionDate=12.01.2008, Mounted=No, PackageDescription="1.27mm x 1.27mm PCB Copper Area (SMD Test Point)", Part Description="1.27mm x 1.27mm PCB Copper Area (SMD Test Point)", Part Number=SMD_PAD_1.27X1.27MM, Pin Count=1, Sense=No, SMD=Yes, Socket=No, Status=None

## Free pads (board coordinates)
  round 4 hole 2.5: 1(14,39.5) 2(64,39.5) 3(64,9.5) 4(14,9.5)

## Via types
v1: diameter 0.6, hole 0.3, Top to Bot, tented both sides, 69 vias
v2: diameter 0.8, hole 0.5, Top to Bot, tented both sides, 47 vias
v3: diameter 0.5, hole 0.2, Top to Bot, tented both sides, 25 vias
v4: diameter 1.2, hole 0.8, Top to Bot, tented both sides, 17 vias

## Nets (pads, with @x,y where several pads share a name; then routed paths per layer and width w, separated by ;. In a path a pad name is that pad's centre, name@x,y a point inside that pad or via, vN(x,y) a via of type N, cw(c..) or ccw(c..) an arc to the next point about the centre after c; other vN are vias at no path point)
ARM_RESETn: IC104.7 JP11.10 R442.2 | length 11.6
  Top w0.152: v1(52.5,43.25) 54.593,43.25 v1(54.933,42.91) ; JP11.10 59.115,43.71 59.17,43.655 v1(60,43.655)
  Bot w0.152: IC104.7 51.757,42.549 52.458,43.25 v1(52.5,43.25) ; v1(54.933,42.91) 55.187,42.656 57.769,42.656 58.183,43.071 58.531,43.071 R442.2 v1(60,43.655)
CAN_CSn: IC35.18 IC38.19 | length 4.7
  Bot w0.152: IC35.18 44.721,21.585 49.244,21.585 IC38.19
CAN_INT: IC35.13 IC38.1 | length 12
  Top w0.152: v1(49.033,25.77) v1(54.113,25.77)
  Bot w0.152: IC35.13 46.075,24.971 46.874,25.77 v1(49.033,25.77) ; v1(54.113,25.77) 54.113,25.476 54.529,25.06 54.529,24.622 54.219,24.312 54.113,24.312 54.113,24.128 IC38.1
CAN_MISO: IC35.17 IC38.23 | length 8
  Top w0.152: v1(43.191,22.468) 44.334,23.611 v1(45.985,23.611)
  Bot w0.152: v1(43.191,22.468) 44.489,22.468 IC35.17 ; v1(45.985,23.611) 46.005,23.591 IC38.23
CAN_MOD: IC34.8 IC104.40 R134.2 | length 40.1
  Top w0.152: v1(38.25,34) 38.25,37 v1(38.75,37.5) ; v1(42.429,46.753) 45.56,46.753 45.716,46.597 46.154,46.597 46.587,47.031 v1(46.7,47.031)
  Bot w0.152: IC34.8 36.683,27.347 R134.2 36.53,29.56 36.09,30 32.159,30 31.125,31.034 31.125,32.591 32.533,34 v1(38.25,34) ; v1(38.75,37.5) 39.123,37.873 39.123,42.127 39.471,42.475 39.471,45.544 40.715,46.787 42.066,46.787 42.099,46.753 v1(42.429,46.753) ; IC104.40 46.55,46.881 v1(46.7,47.031)
CAN_MOD2: IC104.30 R440.2 | length 35.4
  Top w0.152: v1(39.25,36.75) 39.346,36.75 39.346,35.051 39.85,34.547 v1(39.85,34.372) ; v1(40,43.75) 40.87,43.75 40.935,43.685 v1(41.5,44.25)
  Bot w0.152: R440.2 29.399,26.051 29.2,26.25 29.2,32.791 31.3,34.891 38.062,34.891 38.358,34.596 38.902,34.596 39.125,34.372 v1(39.85,34.372) v1@39.7,34.522 ; v1(39.25,36.75) 39.327,36.75 39.518,36.941 39.518,38.013 39.428,38.103 39.428,42.001 40,42.573 v1(40,43.75) ; v1(41.5,44.25) 42.101,44.25 43.801,42.549 IC104.30
CAN_MOSI: IC35.16 IC38.22 | length 4.7
  Bot w0.152: IC35.16 49.18,23.021 IC38.22
CAN_RX: IC35.2 IC104.45 R439.2 | length 50.2
  Top w0.152: v1(49.033,47) 49.16,47 49.86,47.7 50.298,47.7 51.247,46.75 v1(52.275,46.75) ; v1(52,38) 52,35.747 52.218,35.529 v1(52.218,33.973)
  Bot w0.152: R439.2 31.839,21.816 33.838,21.816 34.584,22.563 37.146,22.563 37.733,21.976 37.733,21.087 37.749,21.071 IC35.2 39.865,21.071 41.636,22.842 41.636,23.973 43.078,25.415 43.078,26.97 46.38,30.271 49.595,30.271 49.729,30.405 50.991,30.405 52.075,31.489 52.075,33.829 v1(52.218,33.973) ; v1(49.033,47) 49.05,46.983 IC104.45 ; v1(52,38) 52,40.179 52.655,40.833 52.828,40.833 54.1,42.105 54.1,42.565 54.1,43.087 52.932,44.254 52.932,44.507 53.038,44.613 53.038,45.387 52.619,45.806 52.619,46.089 52.275,46.433 v1(52.275,46.75)
CAN_SCK: IC35.14 IC38.24 | length 4.8
  Bot w0.152: IC35.14 44.661,24.246 46.747,24.246 46.905,24.088 47.636,24.088 47.639,24.091 IC38.24
CAN_TX: IC34.1 IC35.1 IC104.46 | length 44.6
  Top w0.152: v1(50.079,47.171) 50.395,47.171 51.345,46.221 52.494,46.221 ; 52.721,46.221 52.494,46.221 ; v1(52.725,37.5) 52.725,35.275 53,35 v1(53,34) ; v1(53.148,46.286) 52.559,46.286 52.494,46.221
  Bot w0.152: IC34.1 36.716,20.424 38.683,20.424 IC35.1 40.445,20.421 42.136,22.112 42.136,23.807 43.486,25.157 43.486,26.893 46.535,29.941 50.958,29.941 52.747,31.73 52.747,34.206 52.793,34.206 v1(53,34) ; IC104.46 49.562,46.211 49.562,46.77 49.962,47.171 v1(50.079,47.171) ; v1(52.725,37.5) 52.725,38.044 52.471,38.298 52.471,40.219 52.781,40.529 52.954,40.529 54.404,41.979 54.404,42.691 54.404,43.213 53.237,44.38 53.343,44.486 53.343,45.514 53.148,45.709 v1(53.148,46.286)
CAN_USB_N: IC104.32 TP49.1 | length 6.6
  Top w0.152: TP49.1 41,47.89 v1(41,45.75)
  Bot w0.152: v1(41,45.75) 41,45.711 42.105,44.606 42.176,44.606 43.115,43.667 44.283,43.667 IC104.32
CAN_USB_P: IC104.33 TP50.1 | length 6.2
  Top w0.152: v1(41.923,45.607) 41.85,45.681 41.85,47.05 TP50.1
  Bot w0.152: v1(41.923,45.607) 42.883,44.648 42.883,44.37 43.281,43.971 44.322,43.971 IC104.33
CANH: D28.1 IC34.7 J48.2 | length 29.3
  Bot w0.152: J48.2 16.429,22 24.181,22 24.516,22.335 25.036,22.335 25.071,22.3 33.89,22.3 35.413,23.822 IC34.7 35.413,27.887 33.85,29.45 D28.1
CANL: D28.2 IC34.6 J48.3 | length 30.5
  Bot w0.152: J48.3 15,20.889 15,22.189 15.951,23.139 16.885,23.139 17.72,22.305 24.055,22.305 24.389,22.639 25.163,22.639 25.198,22.604 32.139,22.604 34.143,24.609 IC34.6 34.143,27.357 33.95,27.55 D28.2
GND: C120.1 C121.1 C123.1 C124.1 C125.1 C126.1 C127.2 C128.1 C129.1 C130.1 C131.1 C132.1 C133.2 C297.1 C298.1 C299.1 C300.1 C301.1 D28.3 D62.2 IC29.1 IC29.2 IC29.3 IC29.4 IC29.7 IC34.2 IC35.10 IC36.2 IC37.2 IC38.5 IC38.21 IC38.33 IC39.B2 IC39.C1 IC39.D1 IC40.2 IC40.4 IC40.7 IC104.8 IC104.23 IC104.35 IC104.47 IC104.49 IC105.3 J48.4 J49.6 JP11.3 JP11.5 JP11.9 LD10.1 LD13.1 MOD1.3 MOD1.4 R134.1 R137.1 R380.1 TP16.1 | length 74.9
  Top w0.254: JP11.3 55.305,38.904 v2(55.25,38.849) 56.318,38.849 56.575,39.106 JP11.5 ; JP11.9 60,40.8 v2(60.05,40.75)
  Bot w0.254: v2(27.062,42.661) 27.2,42.799 LD13.1 ; D62.2 29.049,19.683 v2(29.116,19.75) ; IC39.B2 30,1.425 30.5,1.925 IC39.C1 IC39.D1 31,3.55 C131.1 30.95,4.45 v2(31,4.5) ; IC40.2 IC40.7 ; R380.1 33.22,13.47 v2(33.25,13.5) ; v2(34.25,4.25) IC40.7 ; C132.1 35.61,3.7 IC40.4 35.05,3.55 IC40.7 ; LD10.1 38.3,42.599 v2(38.365,42.534) ; C300.1 v2(40.666,38.727) 41.221,39.282 41.221,39.724 IC29.7 ; C301.1 43.471,45.079 44.37,45.079 IC104.35 45.55,45.049 v3(46.7,43.899) v3(47.8,42.799) ; C299.1 45.55,38.296 IC104.23 45.55,40.549 v3(45.6,40.599) v3(46.7,41.699) v3(47.8,42.799) ; v2(46.239,22.341) 46.366,22.214 C133.2 ; IC38.21 51.45,22.591 IC38.33 51.95,22.091 IC38.5 55.183,22.091 55.314,21.96 v2(56.272,21.96) ; IC104.49@50.05,44.999 IC104.47 ; v2(51.378,32.41) 51.45,32.482 C126.1 ; C298.1 52.2,42.049 IC104.8 48.55,42.049 v3(47.8,42.799) ; C130.1 v2(60.019,31.3) 60.989,31.3 C297.1 ; v2(59.896,36.971) 60,36.868 IC105.3 ; C128.1 63.719,33.559 64.287,34.127 v2(65.543,34.127) 65.612,34.196 IC37.2 ; C127.2 v2(66.814,31.105)
  Bot w0.508: R137.1 v2(30.968,18.373) 31.253,18.658 C121.1 ; v2(32.523,30.977) 32.596,31.05 C125.1 ; v2(35.241,14.983) 35.241,15.133 35.591,15.483 IC36.2 ; C123.1 36.594,18.52 v2(37.349,18.52) C124.1 ; R134.1 38.413,27.5 v2(38.619,27.294) 38.686,27.227 IC35.10 ; C120.1 43.38,18.15 v2(44.207,18.15)
  Bot w0.762: v2(27,28.5) D28.3 ; IC34.2 35.413,19.324 35.436,19.324 36.34,18.42 C123.1
  other v3: 46.7,40.599 47.8,40.599 48.9,40.599 50,40.599 45.6,41.699 47.8,41.699 48.9,41.699 50,41.699 45.6,42.799 46.7,42.799 48.9,42.799 50,42.799 45.6,43.899 47.8,43.899 48.9,43.899 50,43.899 45.6,44.999 46.7,44.999 47.8,44.999 48.9,44.999 50,44.999
  other v4: 9,1 68.75,1 29.5,8.75 1,9 77,9 23,9.5 61,14.75 20.25,15.5 62.5,22 24.25,33.75 21,39 77,39.75 1,40 25.75,40 62.75,44.5 9.25,47.75 68.75,47.75
LED: IC38.32 IC104.2 R180.1 | length 46.3
  Top w0.152: v1(52.103,45) 51.971,44.868 51.971,41.279 53,40.25 v1(53,40) ; v1(53.7,37.5) 53.7,36.019 54.219,35.5 v1(54,35.5)
  Bot w0.152: R180.1 34,39.152 36.635,36.517 38.664,36.517 39.124,36.057 48.011,36.057 48.13,35.938 51.19,35.938 51.281,36.029 51.725,36.029 52.06,35.693 52.829,35.693 53.022,35.5 v1(54,35.5) ; IC104.2 52.054,45.049 v1(52.103,45) ; v1(53,40) 53,38.2 v1(53.7,37.5) ; IC38.32 53.45,30.709 54.443,31.702 54.443,34.848 v1@53.895,35.395
NetC122_1: C122.1 IC36.4 | length 10.9
  Bot w0.152: IC36.4 34.047,14.377 34.047,13.852 41.337,13.852 42.155,14.67 42.155,15.702 41.978,15.702 C122.1
NetC122_2: C122.2 IC36.3 L9.1 | length 5.1
  Bot w0.508: IC36.3 41.335,14.533 41.616,14.814
NetC123_2: C123.2 D29.1 IC36.1 R265.2 | length 13.1
  Top w0.508: v1(30,16.5) 32.492,16.5 32.505,16.488 v1(33.25,17.233)
  Bot w0.152: v1(30,16.5) 30,14 30.25,13.75 R265.2
  Bot w0.508: D29.1 29.75,16.25 v1(30,16.5) ; v1(33.25,17.233) 33.267,17.25 34.847,17.25 ; C123.2 34.847,18.159 34.847,17.25 ; IC36.1 35.256,16.433 34.847,16.842 34.847,17.25
NetC125_2: C125.2 IC35.9 Q4.1 | length 16
  Bot w0.152: C125.2 36.8,31.95 Q4.1 40.89,31.5 41.54,30.85 41.54,26.532 40.629,25.621 IC35.9
NetC126_2: C126.2 IC35.8 Q4.2 | length 18.2
  Bot w0.152: IC35.8 41.503,24.971 42.429,25.897 42.429,30.723 43.206,31.5 Q4.2 48.55,31.5 C126.2
NetC133_1: C133.1 IC38.20 | length 1.3
  Bot w0.254: C133.1 48.082,22.091 IC38.20
NetIC34_4: IC34.4 R439.1 | length 1.5
  Bot w0.152: R439.1 31.395,20.392 IC34.4
NetIC34_5: IC34.5 R440.1 | length 1.1
  Bot w0.254: R440.1 IC34.5@32.614,26.051
NetIC35_19: IC35.19 R133.2 | length 4.3
  Bot w0.508: R133.2 41.616,20.025 42.661,21.071 IC35.19
NetIC36_5: IC36.5 R265.1 R380.2 | length 4.6
  Bot w0.152: R380.2 31.97,13.06 R265.1 32.621,13.75 32.621,15.121 32.983,15.483 IC36.5
NetIC36_6: IC36.6 R136.1 | length 2.5
  Bot w0.152: R136.1 31.97,15.02 33.383,16.433 IC36.6
NetLD10_2: LD10.2 R180.2 | length 2.8
  Bot w0.254: R180.2 34.7,42.67 LD10.2
NetLD13_2: LD13.2 R142.2 | length 2.1
  Bot w0.254: LD13.2 30.8,42.67 R142.2
NetR135_1: R135.1 R136.2 R137.2 | length 2.4
  Bot w0.152: R136.2@30.968,15.006 R137.2
  Bot w0.508: R137.2 31.212,16.261 32.238,16.261 R135.1
NetR140_2: R140.2 T7.2 | length 1.3
  Bot w0.152: R140.2 58.349,24.112 T7.2
NetR143_2: R143.2 T7.5 | length 1.4
  Bot w0.152: R143.2 58.349,19.554 T7.5
P1V8: C127.1 C132.2 IC37.5 IC40.1 IC40.5 R139.1 R141.1 | length 66
  Top w0.254: v2(55.75,17.5) 55.765,17.515 v2(57.161,17.515) 57.396,17.75 v2(59,17.75)
  Bot w0.254: IC40.1 33.021,1.969 32.531,1.969 31.921,2.579 31.921,3.779 31.984,3.842 31.984,4.104 32.81,4.929 34.531,4.929 34.566,4.894 37.356,4.894 38,4.25 38,2.75 ; IC40.5 38,2.75 ; v2(55.75,17.5) 55.75,12.497 46.003,2.75 38,2.75 ; v2(57.161,17.515) R139.1 ; R141.1 59,18.249 v2(59,17.75) 59.035,17.715 60.208,17.715 61.567,19.075 61.567,19.281 67.067,24.781 67.067,27.04 64.126,29.981 C127.1 64.662,31.64 IC37.5
P3V3: C120.2 C129.2 C130.2 C131.2 C298.2 C299.2 C300.2 C301.2 IC29.8 IC35.20 IC38.4 IC38.18 IC39.B1 IC104.9 IC104.24 IC104.36 IC104.48 IC105.2 J49.2 JP11.1 R133.1 R138.1 R140.1 R142.1 R143.1 R215.2 R217.2 R442.1 TP15.1 | length 249.5
  Top w0.254: J49.2 16.699,36.997 v2(16.775,37.073) ; TP15.1 18.299,41.518 v2(18.426,41.391) ; v2(53.471,42.5) 53.65,42.5 54.035,42.115 JP11.1 ; v2(59.193,24.246) v2@60.722,24.246
  Top w0.508: v2(43.5,12.25) 43.5,8.824 v2(43.572,8.752) ; v2(54,16) v2(57,16) ; v2(61,20) 61.247,20 v2(62.247,19)
  Bot w0.254: v2(16.775,37.073) R138.1@19.315,37.073 ; v2(18.426,41.391) 19.315,40.502 R138.1@19.315,37.073 ; R138.1 R138.1@19.315,37.073 ; 29,4.5 29,2.25 29.096,2.154 29.096,2.082 29.332,1.846 29.846,1.846 30,2 IC39.B1 30,3.55 C131.2 ; R142.1 25.423,41.53 20.966,37.073 R138.1@19.315,37.073 ; R217.2 R215.2 ; C300.2 42.25,38.38 IC29.8 IC29.8@42.847,39.074 ; C301.2 43.612,46.2 ; C120.2 43.318,19.112 43.318,20.405 43.333,20.421 IC35.20 ; IC104.36 44.4,45.774 43.974,46.2 43.612,46.2 ; IC104.24 45.05,38.811 44.55,38.311 C299.2 43.725,38.196 IC29.8@42.847,39.074 ; 47.621,20.421 48.291,21.091 IC38.18 ; IC104.48 51.224,46.199 51.528,46.503 ; 51.028,47.003 51.203,47.003 52.264,45.942 52.264,45.659 52.683,45.24 52.683,44.76 52.577,44.654 52.577,44.107 53.079,43.604 v2@53.079,42.5 ; IC104.9 52.849,41.549 53.079,41.779 v2@53.079,42.5 ; v2(53.471,42.5) v2@53.079,42.5 ; IC38.4 55.183,22.591 C129.2 56.439,23.847 56.439,24.508 57.01,25.079 57.49,25.079 57.526,25.043 58.25,25.043 R140.1 58.359,25.097 58.893,24.563 ; R143.1 58.177,17.323 58.607,16.893 58.75,16.75 ; C130.2 IC105.2 59.05,33.904 59.896,34.75 61.64,34.75 64.11,37.221 64.944,37.221 65.153,37.429 67.321,37.429 67.5,37.25 ; R442.1 60.225,42.715 60.641,43.131 60.641,48.012 60.75,48.121 ; R215.2 42.196,43.38 43.411,42.165 43.411,39.492 42.993,39.074 IC29.8@42.847,39.074 ; R215.2 41.866,43.576 41.806,43.516 41.326,43.516 40.421,44.421 40.421,45.99 40.862,46.431 41.918,46.431 41.952,46.398 41.965,46.398 42.329,46.033 42.329,46.02 42.45,45.9 43.312,45.9 43.612,46.2
  Bot w0.508: v2(18.426,41.391) 24.991,47.956 43.25,47.956 ; 29,4.5 29,5.4 30.447,6.847 43.572,6.847 ; R133.1 42.423,18.144 ; C301.2 43.25,47.956 ; C120.2 42.835,19.064 42.556,18.785 42.556,18.277 42.423,18.144 ; v2(43.5,12.25) 43.5,16.3 43.572,16.372 ; v2(43.572,8.752) 43.572,6.847 ; 47.621,20.421 47.621,18.262 45.731,16.372 43.572,16.372 ; 51.528,46.503 51.028,47.003 50.994,47.037 50.994,47.95 51,47.956 ; v2(54,16) 54.094,15.906 54.094,13.844 47.097,6.847 43.572,6.847 ; v2(57,16) 57.893,16.893 58.607,16.893 59.71,16.893 59.999,17.182 60.429,17.182 v2(62.247,19) 67.62,24.373 67.62,37.13 67.5,37.25 67.5,43 62.379,48.121 60.75,48.121 60.371,48.5 52.716,48.5 52.672,48.544 52.087,48.544 52.044,48.5 51.544,48.5 51,47.956 ; v2(61,20) 61,24.148 v2(61.098,24.246) ; 42.423,18.144 42.423,17.644 43.572,16.495 43.572,16.372 ; 43.25,47.956 43.837,48.544 50.413,48.544 51,47.956
P5V0: C121.2 C124.2 C128.2 C297.2 IC34.3 IC37.1 IC37.3 IC105.1 L9.2 MOD1.1 MOD1.2 R135.2 | length 101.3
  Top w0.508: v2(36.886,21.934) 36.886,20.596 37.633,19.849 v2(37.633,19.743) ; v2(42.423,8.75) 42.423,12.184 v2(42.438,12.2) ; v2(53.288,15.089) 56.977,15.089 57,15.066 v2(57,15) ; v2(66.562,36.75) v2(68.504,36.75)
  Bot w0.508: MOD1.1 MOD1.2 29.02,6.847 29.923,7.75 41.423,7.75 v2(42.423,8.75) 42.43,8.75 43.238,9.558 47.758,9.558 v2(53.288,15.089) ; R135.2 32.238,17.22 33.1,18.082 C121.2 34.143,19.701 IC34.3 34.143,21.439 34.595,21.891 36.929,21.891 v2(36.886,21.934) ; v2(37.633,19.743) 39.367,19.743 39.896,19.214 C124.2 39.896,17.417 L9.2@39.376,16.896 ; L9.2 L9.2@39.376,16.896 ; v2(42.438,12.2) 42.637,12.399 42.637,16.415 42.156,16.896 L9.2@39.376,16.896 ; v2(57,15) 58.751,15 60.272,16.522 60.909,16.522 68.75,24.363 68.75,36.504 v2(68.504,36.75) ; C297.2 61,33.542 IC105.1 61.916,33.592 62.599,34.275 62.894,34.275 C128.2 63.078,34.72 63.835,35.477 IC37.1 64.662,36.54 64.809,36.687 65.165,36.687 65.228,36.75 v2@66.297,36.75 ; IC37.3 v2@66.562,36.485
P12V0: D29.2 D62.1 J48.1 | length 19.7
  Top w0.508: v2(24.776,21.706) v2(24.776,23.611)
  Bot w0.508: J48.1 18.449,24.551 19.017,23.983 v2@24.776,23.983 ; v2(24.776,21.706) 24.776,21.579 25.284,21.071 25.284,18.238 26.272,17.25 26.272,16.838 D29.2 ; v2(24.776,23.611) v2@24.776,23.983 ; D62.1 v2@24.776,23.983
PROG_MISO: IC38.16 J49.1 TP5.1 | length 79.7